# Altium PCB PSNEM-MCU-Subsystem.PcbDoc
Units mil, origin at the board's own origin, x right, y up, seen from the top; angles counter-clockwise.
Board outline 3000 x 2000 mil, 4 copper layers (Top Layer, GROUND, POWER, Bottom Layer), stack 23.756 mil thick; 36 components, 24 nets, 171 pads, 28 vias.
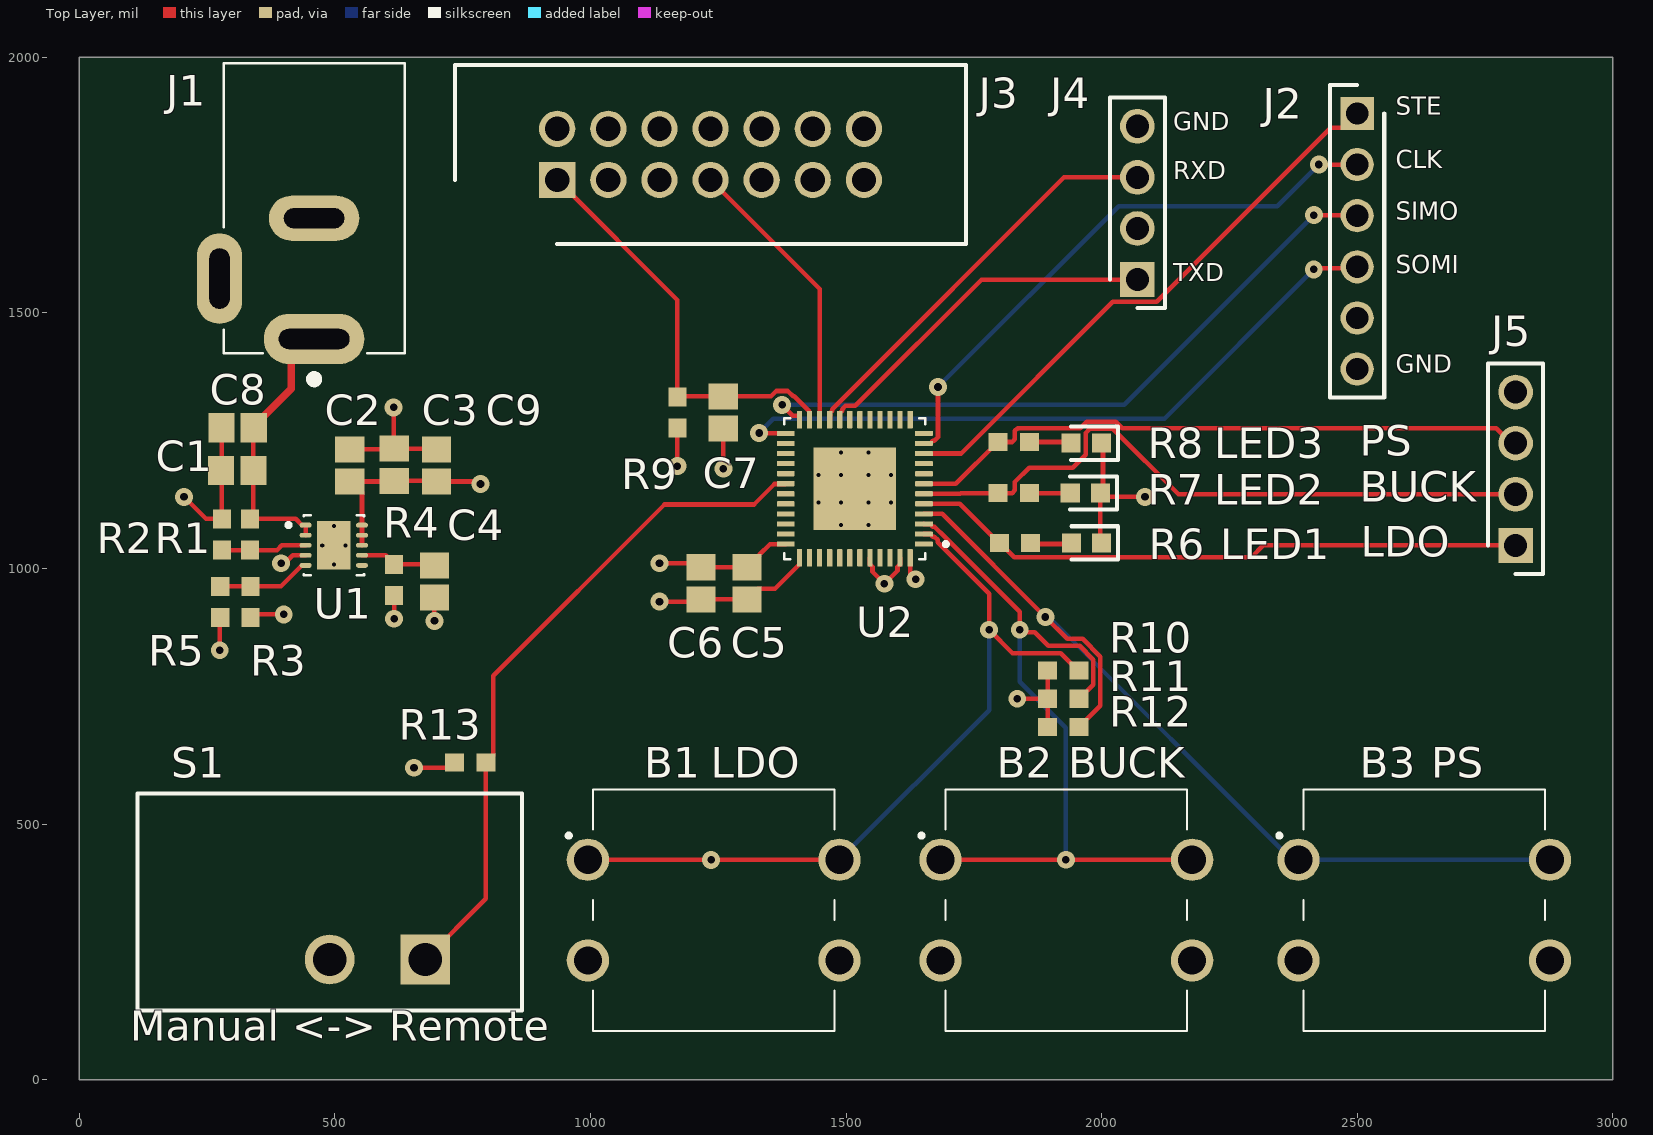
[diagram p0: Top Layer view]
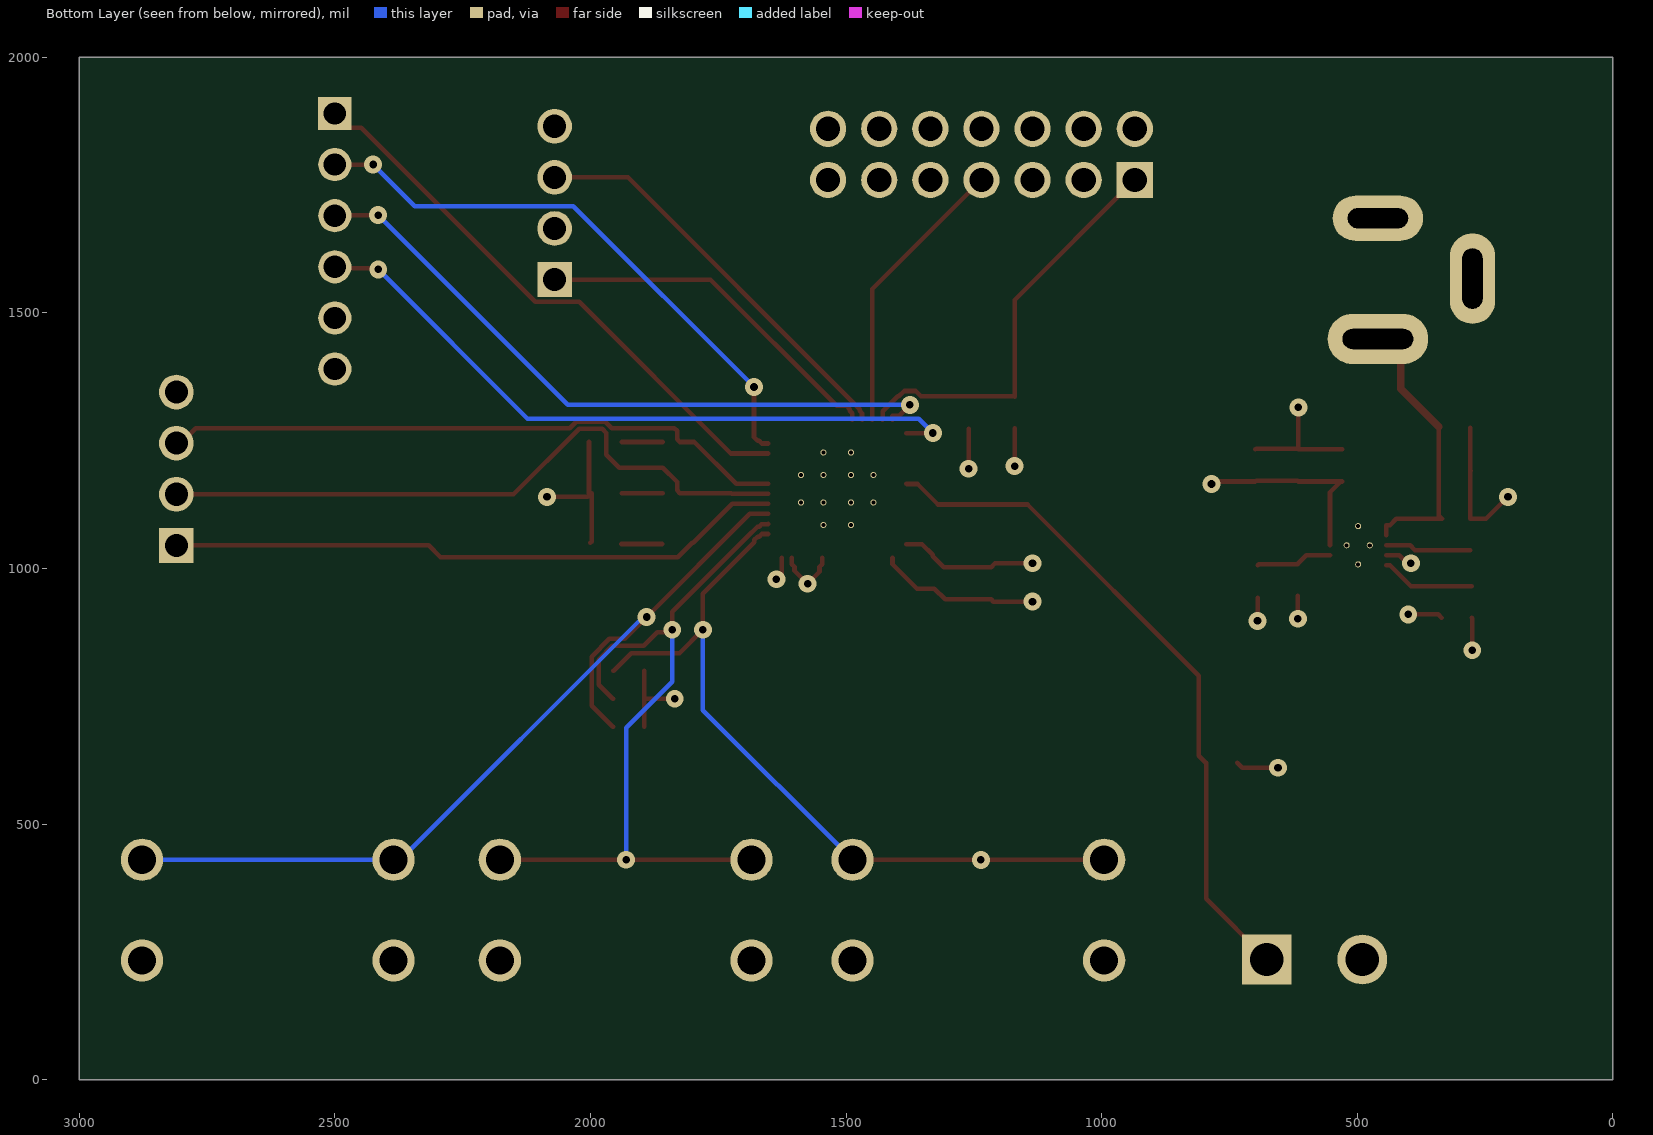
[diagram p1: Bottom Layer view, seen from below]
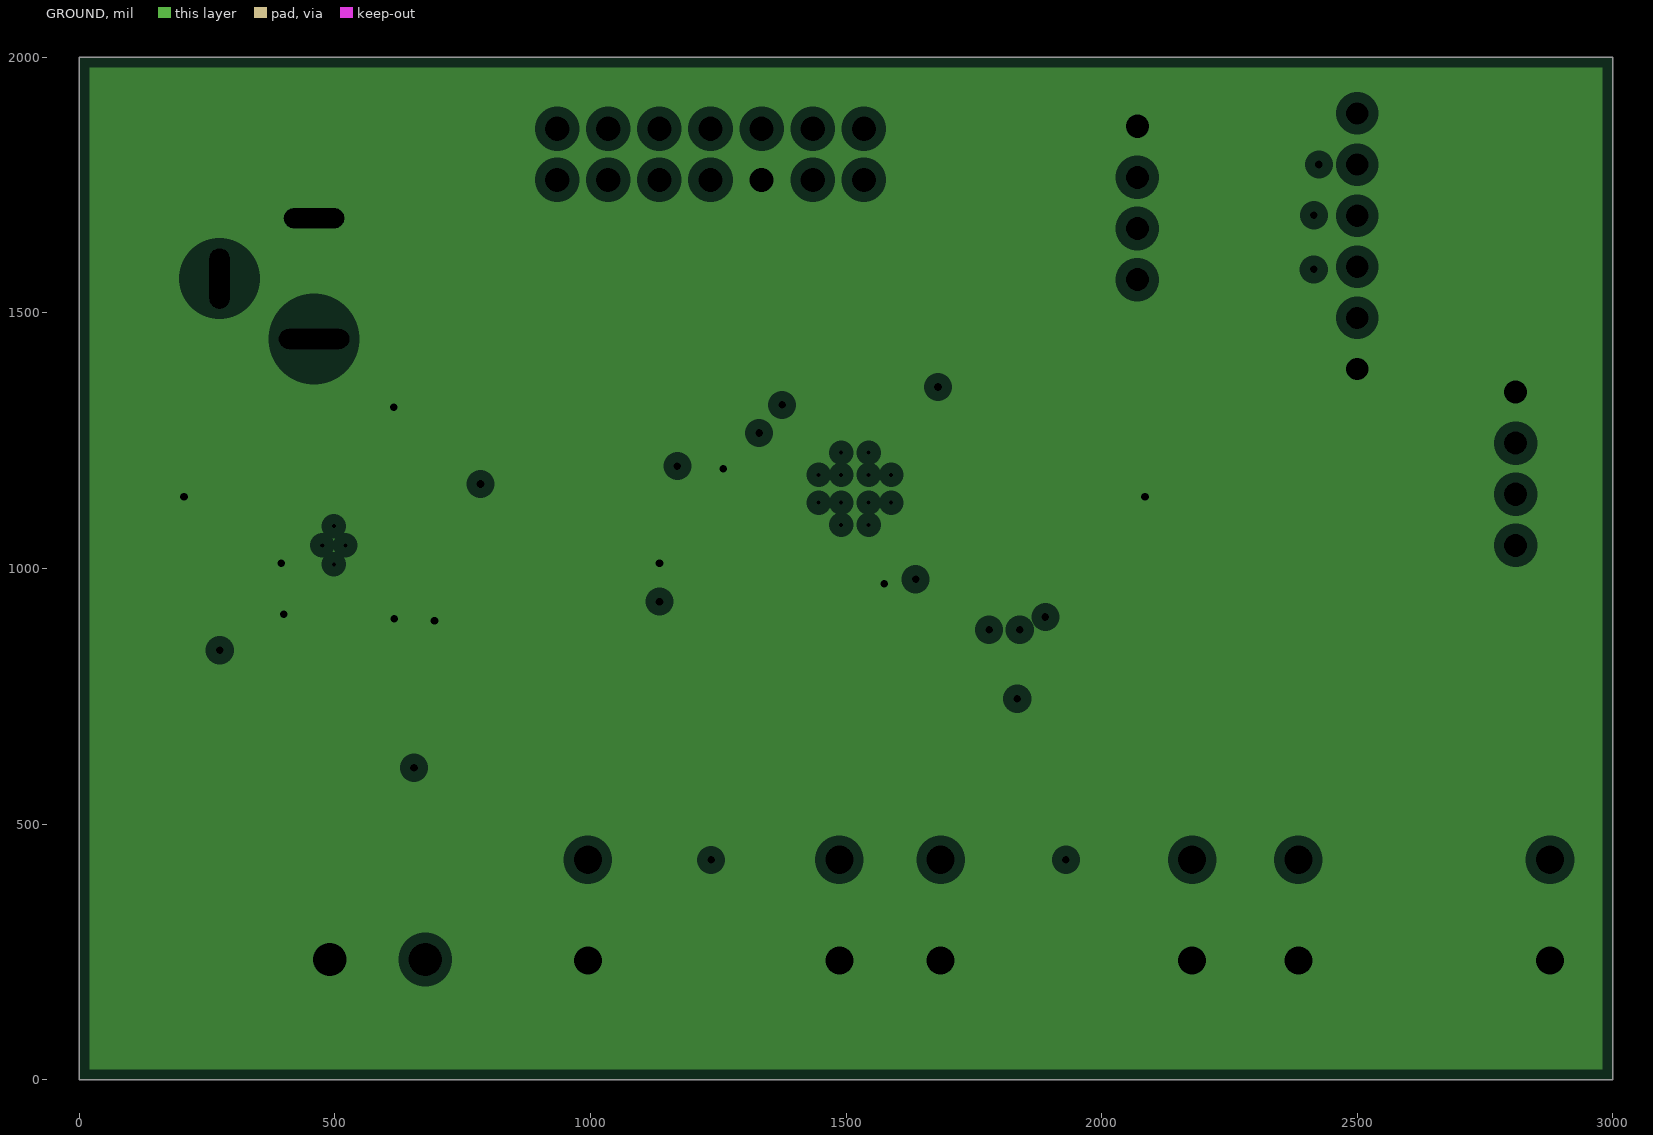
[diagram p2: GROUND, clearances drawn from the general rule]
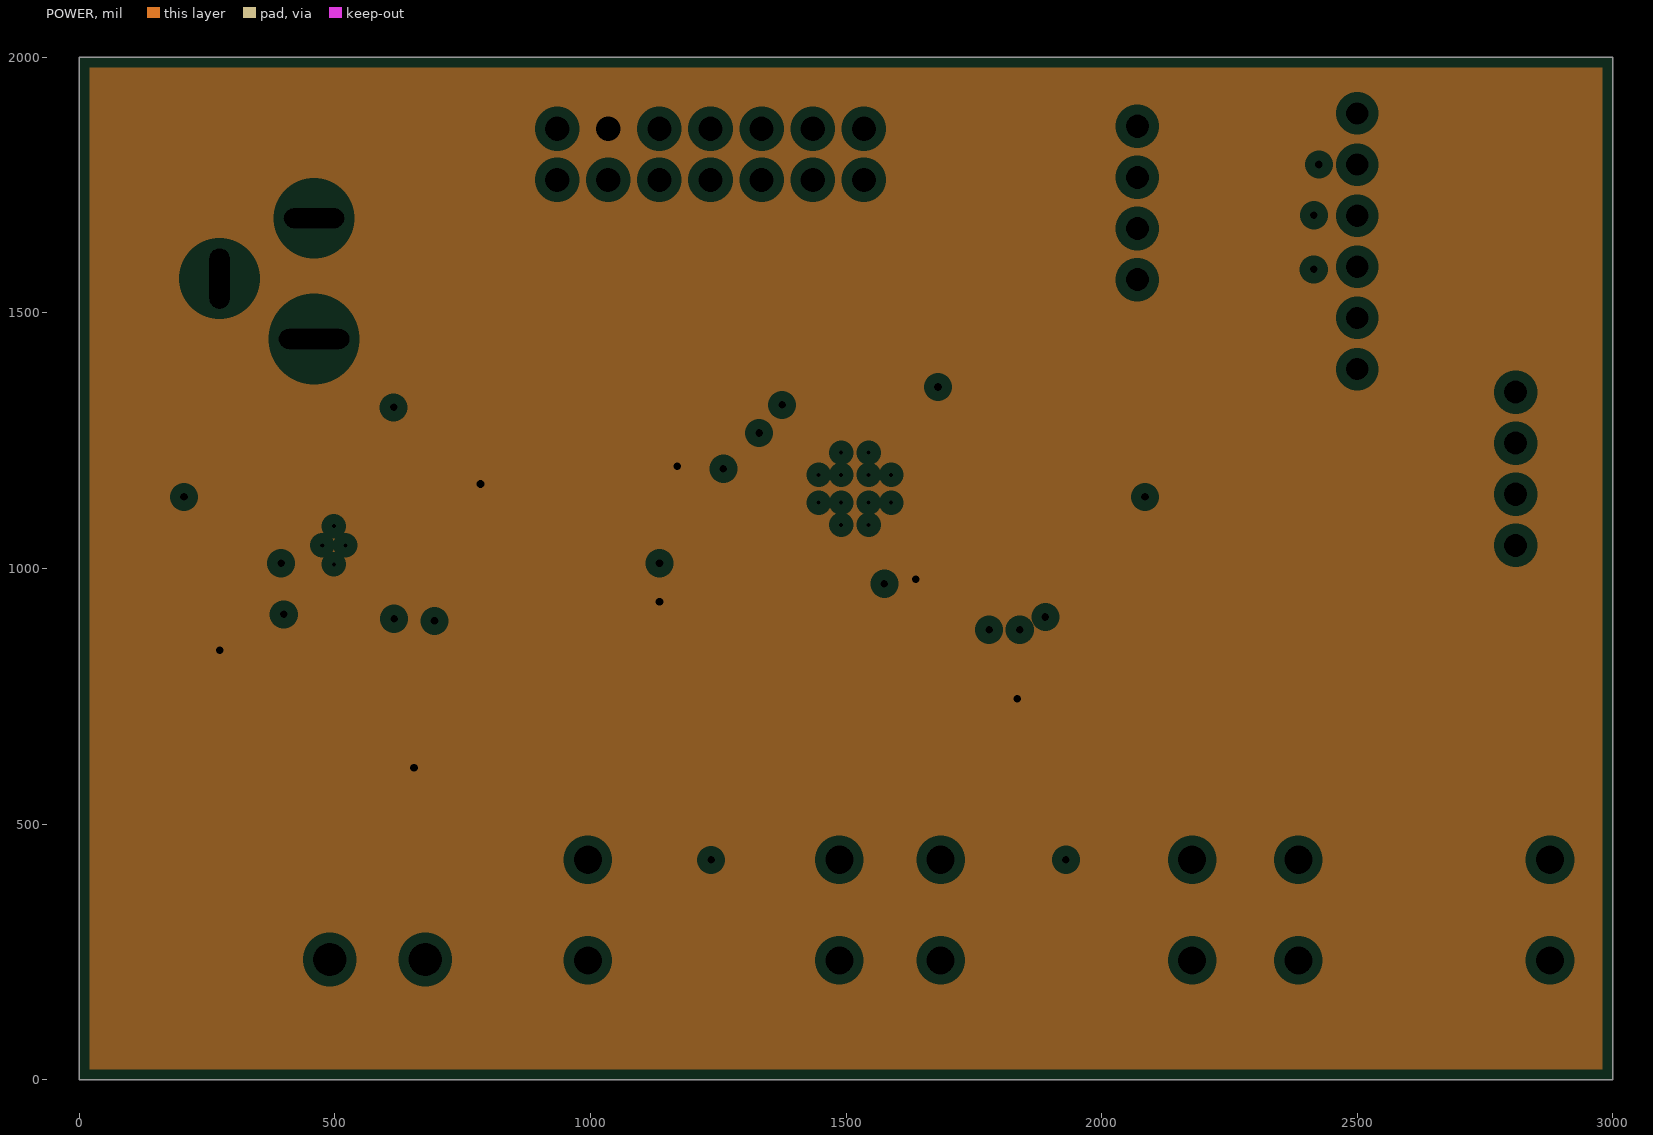
[diagram p3: POWER, clearances drawn from the general rule]

## Layer stack, top to bottom
Top Solder: solder mask 0.4, Solder Resist, Dk 3.5
Top Layer: signal copper 1.378
Dielectric 2: prepreg 2.8, PP-006, Dk 4.1
GROUND: plane copper 1.4, net GND
Dielectric 1: dielectric 12.6, FR-4, Dk 4.8
POWER: plane copper 1.4, net NetC2_1
Dielectric 3: prepreg 2.8, PP-006, Dk 4.1
Bottom Layer: signal copper 1.378
Bottom Solder: solder mask 0.4, Solder Resist, Dk 3.5

## Board outline
0,0 0,2000 3000,2000 3000,0

## Design rules (kind name [scope] priority, off if disabled: settings)
Clearance [All] p1: gap=5 ignorepadtopadclearanceinfootprint=TRUE
HoleSize [All] p1: absolutevalues=TRUE maxlimit=200 minlimit=7 maxpercent=80.000 minpercent=20.000
MinimumSolderMaskSliver [All] p1: minsoldermaskwidth=5
PlaneClearance [All] p1: clearance=20
PlaneConnect [All] p1: planeconnectstyle=Relief reliefexpansion=20 reliefentries=4 reliefconductorwidth=10 reliefairgap=10
PolygonConnect [All] p1: connectstyle=Relief reliefconductorwidth=10 reliefentries=4 polygonreliefangle="90 Angle" airgapwidth=10
RoutingVias [All] p1: holewidth=28 width=50 viastyle="Through Hole" minholewidth=15 minwidth=35 maxholewidth=15 maxwidth=35
SilkToSolderMaskClearance [IsPad] p1: minsilkscreentomaskgap=5 clearancetoexposedcopper=TRUE
SolderMaskExpansion [All] p1: expansion=4 istentingtop=FALSE
SupplyNets "Schematic Supply Nets_8" [InNet('+3.3V')] p1: voltage=0.000
SupplyNets "Schematic Supply Nets_7" [InNet('GND')] p2: voltage=0.000
SupplyNets "Schematic Supply Nets" [InNet('+5V')] p3: voltage=0.000
Width [All] p1: maxlimit=1000 minlimit=5 preferedwidth=9
25 further rules are at their usual default settings.

## Classes and differential pairs
component class U_Power: C1 C2 C3 C4 C8 C9 J1 R1 R2 R3 R4 R5 U1
component class U_MicroController: B1 B2 B3 C5 C6 J5 LED1 LED2 LED3 R6 R7 R8 R10 R11 R12 R13 S1 U2
component class U_Connectors: C7 J2 J3 J4 R9

## Components (designator, comment, footprint, x,y, rotation, side; value= is the part's Value field where it differs from the comment)
B1 "FSM101" FSM101 1245,320 r180 top
B2 "FSM101" FSM101 1935,320 r180 top
B3 "FSM101" FSM101 2635,320 r180 top
C1 "10u" "0805 Cap" 309.13,1191.42 r180 top
C2 "10u" "0805 Cap" 529.13,1201.42 r90 top
C3 "1u" "0805 Cap" 616.14,1202.76 r270 top
C4 "4.7u" "0805 Cap" 694.88,974.41 r90 top
C5 "1u" "0805 Cap" 1306.17,970.91 r270 top
C6 "0.1u" "0805 Cap" 1216.17,970.91 r270 top
C7 "2.2n" "0805 Cap" 1260,1305 r90 top
C8 "0.1u" "0805 Cap" 310,1275 r0 top
C9 "0.1u" "0805 Cap" 699.13,1201.42 r90 top
J1 "PJ-002B" PJ-002B 459.53,1685.04 r90 top
J2 "61300611121" 61300611121 2500,1890 r270 top
J3 "0702461402" 0702461402 1235,1810 r0 top
J4 "61300411121" 61300411121 2070,1715 r90 top
J5 "61300411121" 61300411121 2810,1195 r90 top
LED1 "150060VS75000" 150060VS75000 1970.51,1050 r180 top
LED2 "150060VS75000" 150060VS75000 1968.19,1147.34 r180 top
LED3 "150060VS75000" 150060VS75000 1970,1245 r180 top
R1 "226k" RESC1608X06N 334.13,1066.42 r90 top
R2 "100K" RESC1608X06N 279.13,1066.42 r270 top
R3 "100K" RESC1608X06N 335,934.21 r270 top
R4 "22.1K" RESC1608X06N 616.14,977.36 r90 top
R5 "1.5M" RESC1608X06N 275.94,934.21 r90 top
R6 "64.9" RESC1608X06N 1830.51,1050 r0 top
R7 "64.9" RESC1608X06N 1828.19,1147.34 r0 top
R8 "64.9" RESC1608X06N 1828.19,1247.34 r0 top
R9 "47K" RESC1608X06N 1170,1305 r270 top
R10 "10K" RESC1608X06N 1925,800 r180 top
R11 "10K" RESC1608X06N 1925,745 r180 top
R12 "10K" RESC1608X06N 1925,690 r180 top
R13 "10K" RESC1608X06N 765,620 r180 top
S1 "L101011MS02Q" L101011MS02Q 677.01,235 r90 top
U1 "TPS7A9401DSCR" TPS7A9401DSCR 498.03,1045.28 r0 top
U2 "MSP430FR5969IRGZR" MSP430FR5969IRGZR 1517.24,1155.83 r180 top

## Footprints (in the part's own frame and the unit in brackets; to place one, negate y for a bottom-side part, rotate by r counter-clockwise, add the part's x,y. Pads: shape width x height; smd on the part's side, far side on the other; paste and mask are expansions set on the pad)
"0805 Cap" [mm] "Chip Capacitor, 2-Leads, Body 2.00x1.25mm, IPC Medium Density"
  rect 1.3x1.45 smd: 1(-0.8,0) 2(0.8,0)
  body extent -1.1,-0.72 1.1,0.72, height 1.45
150060VS75000 [mm] "LED GREEN CLEAR 0603 SMD"
  rect 0.95x0.95 smd: 1(-0.75,0) 2(0.75,0)
  silkscreen extent -1.58,-0.82 0.75,0.82, body extent -0.8,-0.4 0.8,0.4, height 0.7
0702461402 [mm] "Connector Header Through Hole 14 position 0.100\" (2.54mm)"
  rect 1.8x1.8 / inner round 1.8 / far side rect 1.8x1.8 hole 1.2: 1(-7.62,-1.27)
  round 1.8 hole 1.2: 2(-7.62,1.27) 3(-5.08,-1.27) 4(-5.08,1.27) 5(-2.54,-1.27) 6(-2.54,1.27) 7(0,-1.27) 8(0,1.27) 9(2.54,-1.27) 10(2.54,1.27) 11(5.08,-1.27) 12(5.08,1.27) 13(7.62,-1.27) 14(7.62,1.27)
  silkscreen extent -12.7,-4.44 12.7,4.44, body extent -12.7,-4.44 12.7,4.44, height 9.3
61300411121 [mm] "Connector Header Through Hole 4 position 0.100\" (2.54mm)"
  rect 1.725x1.725 / inner round 1.725 / far side rect 1.725x1.725 hole 1.15: 1(-3.81,0)
  round 1.725 hole 1.15: 2(-1.27,0) 3(1.27,0) 4(3.81,0)
  silkscreen extent -5.23,-1.37 5.23,1.37, body extent -5.08,-1.27 5.08,1.27, height 7.27
61300611121 [mm] "Connector Header Through Hole 6 position 0.100\" (2.54mm)"
  rect 1.65x1.65 / inner round 1.65 / far side rect 1.65x1.65 hole 1.1: 1(0,0)
  round 1.65 hole 1.1: 2(2.54,0) 3(5.08,0) 4(7.62,0) 5(10.16,0) 6(12.7,0)
  silkscreen extent -1.42,-1.35 14.12,1.35, body extent -1.27,-1.27 13.97,1.27, height 8.69
FSM101 [mm] "Tactile Switch SPST-NO Top Actuated Through Hole"
  round 2.1 hole 1.4: 1(6.35,-2.794) 2(-6.15,-2.794) 3(6.35,2.206) 4(-6.15,2.206)
  silkscreen extent -5.9,-6.29 7.4,5.71, body extent -6.85,-6.29 6.85,5.72, height 7.6
L101011MS02Q [mm] "SWITCH SLIDE SPST 4A 125V"
  rect 2.475x2.475 hole 1.65: 1(0,0)
  round 2.475 hole 1.65: 2(0,4.75)
  silkscreen extent -2.55,-4.8 8.25,14.3, body extent -2.6,-4.85 8.19,14.25, height 14.1
MSP430FR5969IRGZR [mm] "MSP430 CPUXV2 MSP430™ FRAM Microcontroller IC 16-Bit 16MHz 64KB (64K x 8) FRAM 48-VQFN (7x7)"
  rrect25% 0.88x0.26 smd: 1(-3.435,2.75) 2(-3.435,2.25) 3(-3.435,1.75) 4(-3.435,1.25) 5(-3.435,0.75) 6(-3.435,0.25) 7(-3.435,-0.25) 8(-3.435,-0.75) 9(-3.435,-1.25) 10(-3.435,-1.75) 11(-3.435,-2.25) 12(-3.435,-2.75) 25(3.435,-2.75) 26(3.435,-2.25) 27(3.435,-1.75) 28(3.435,-1.25) 29(3.435,-0.75) 30(3.435,-0.25) 31(3.435,0.25) 32(3.435,0.75) 33(3.435,1.25) 34(3.435,1.75) 35(3.435,2.25) 36(3.435,2.75)
  rrect25% 0.26x0.88 smd: 13(-2.75,-3.435) 14(-2.25,-3.435) 15(-1.75,-3.435) 16(-1.25,-3.435) 17(-0.75,-3.435) 18(-0.25,-3.435) 19(0.25,-3.435) 20(0.75,-3.435) 21(1.25,-3.435) 22(1.75,-3.435) 23(2.25,-3.435) 24(2.75,-3.435) 37(2.75,3.435) 38(2.25,3.435) 39(1.75,3.435) 40(1.25,3.435) 41(0.75,3.435) 42(0.25,3.435) 43(-0.25,3.435) 44(-0.75,3.435) 45(-1.25,3.435) 46(-1.75,3.435) 47(-2.25,3.435) 48(-2.75,3.435)
  rect 4.1x4.1 smd paste-1.465: 49(0,0)
  round 0.3 hole 0.2: 50(-0.685,1.8) 51(0.685,1.8) 52(-1.8,0.685) 53(-0.685,0.685) 54(0.685,0.685) 55(1.8,0.685) 56(-1.8,-0.685) 57(-0.685,-0.685) 58(0.685,-0.685) 59(1.8,-0.685) 60(-0.685,-1.8) 61(0.685,-1.8)
  silkscreen extent -4.62,-3.5 3.5,3.5, body extent -3.5,-3.5 3.5,3.5, height 1
PJ-002B [mm] "Power Barrel Connector Jack 2.50mm ID (0.098\"), 5.50mm OD (0.217\") Through Hole, Right Angle"
  oval 2.5x5 hole 1 slot 3.5 at 90 deg: 1(-6,0)
  oval 2.25x4.5 hole 1 slot 3 at 90 deg: 2(0,0)
  oval 4.5x2.25 hole 1 slot 3 at 0 deg: 3(-3,4.7)
  silkscreen extent -8.2,-4.5 7.7,4.5, body extent -6.7,-4.5 7.7,4.9, height 11
RESC1608X06N [mm] "Chip Resistor, 2-Leads, Body 1.60x0.80mm, IPC Medium Density"
  rect 0.95x0.9 smd: 1(-0.775,0) 2(0.775,0)
  body extent -0.9,-0.45 0.9,0.45, height 0.55
TPS7A9401DSCR [mm] "Linear Voltage Regulator IC Positive Adjustable 1 Output 1A 10-WSON (3x3)"
  oval 0.6x0.24 smd paste-1 mask+0: 1(-1.4,1) 2(-1.4,0.5) 3(-1.4,0) 4(-1.4,-0.5) 5(-1.4,-1) 6(1.4,-1) 7(1.4,-0.5) 8(1.4,0) 9(1.4,0.5) 10(1.4,1)
  rect 1.65x2.4 smd paste-2 mask+0.07: 11(0,0)
  round 0.3 hole 0.2 mask+0: 12(0,0.95) 13(-0.575,0) 14(0.575,0) 15(0,-0.95)
  silkscreen extent -2.35,-1.5 1.5,1.5, body extent -1.5,-1.5 1.5,1.5, height 0.8

## Part data
B1 B2 B3: "Tactile Switch SPST-NO Top Actuated Through Hole"
C1 C2: library part CL21B106KPQNNNE, "10 µF ±10% 10V Ceramic Capacitor X7R 0805 (2012 Metric)"
C3 C5: library part CC0805KKX7R7BB105, "1 µF ±10% 16V Ceramic Capacitor X7R 0805 (2012 Metric)"
C4: library part CL21B475KOFNFNE, "4.7 µF ±10% 16V Ceramic Capacitor X7R 0805 (2012 Metric)"
C6 C8 C9: library part CC0805KRX7R9BB104, "0.1 µF ±10% 50V Ceramic Capacitor X7R 0805 (2012 Metric)"
C7: library part CC0805KRX7R9BB222, "2200 pF ±10% 50V Ceramic Capacitor X7R 0805 (2012 Metric)"
J1: "Power Barrel Connector Jack 2.50mm ID (0.098\"), 5.50mm OD (0.217\") Through Hole, Right Angle"
J2: "CONN HEADER VERT 6POS 2.54MM"
J3: "Connector Header Through Hole 14 position 0.100\" (2.54mm)"
J4 J5: "Connector Header Through Hole 4 position 0.100\" (2.54mm)"
LED1 LED2 LED3: "LED GREEN CLEAR 0603 SMD"
R1: library part RN73H1JTTD2263B25, "Thin Film Resistors - SMD 226kOhm,0603,0.1%,25"
R2 R3: library part ERA-3VRW1003V, "Thin Film Resistors - SMD 0603 0.05% 100Kohm 10ppm SMD"
R4: library part TNPW060322K1BEEA, "Thin Film Resistors - SMD 22.1Kohms .1% 25ppm"
R5: library part MCT0603MD1504BP500, "Thin Film Resistors - SMD .125W 1.5Mohms .1% 0603 25ppm"
R6 R7 R8: library part ERA-3AEB64R9V, "Thin Film Resistors - SMD 0603 64.9ohm 0.1% 25ppm"
R9: library part ERA-3VEB4702V, "Thin Film Resistors - SMD 0603 0.1% 47Kohm 25ppm SMD"
R10 R11 R12 R13: library part CRCW060310K0FKEAHP, "RES SMD 10K OHM 1% 1/3W 0603"
S1: "SWITCH SLIDE SPST 4A 125V"
U1: "Linear Voltage Regulator IC Positive Adjustable 1 Output 1A 10-WSON (3x3)", Manufacturer="Texas Instruments", Manufacturer PN=TPS7A9401DSCR
U2: "MSP430 CPUXV2 MSP430™ FRAM Microcontroller IC 16-Bit 16MHz 64KB (64K x 8) FRAM 48-VQFN (7x7)"

## Via types
v1: diameter 35, hole 15, Top Layer to Bottom Layer, 28 vias

## Nets (pads, with @x,y where several pads share a name; then routed paths per layer and width w, separated by ;. In a path a pad name is that pad's centre, name@x,y a point inside that pad or via, vN(x,y) a via of type N, cw(c..) or ccw(c..) an arc to the next point about the centre after c; other vN are vias at no path point)
+3.3V: C2.1 C3.2 C5.2 C6.2 C9.1 J3.4 R5.1 R9.2 R10.2 R11.2 R12.2 R13.2 U1.8 U1.9 U1.10 U2.37 U2.48 | length 1146.8
  Top Layer w9: v1(275,840) 275,902.76 R5.1 ; C2.1 C2.1@532.06,1169.92 ; U1.8 U1.9 U1.10 553.15,1148.83 C2.1@532.06,1169.92 ; v1(655,610) 724.49,610 R13.2 ; v1(785,1165) 780.08,1169.92 C9.1 697.8,1171.26 C3.2 614.8,1169.92 C2.1@532.06,1169.92 ; v1(1135,935) 1211.76,935 C6.2 C5.2 1327.26,960.5 1361.09,960.5 1408.98,1008.39 U2.37 ; v1(1170,1200) R9.2 ; U2.48 1625.51,989.52 v1(1636.18,978.85) ; v1(1835,745) R11.2 ; R12.2 R11.2 ; R10.2 R11.2
+5V: C1.1 C8.2 J1.1 R1.2 U1.1 U1.2 | length 539.4
  Top Layer w9: C8.2@340.63,1277.09 C1.1 340.63,1103.43 R1.2 423.42,1096.93 435.71,1084.65 U1.1 U1.2
  Top Layer w15: C8.2@340.63,1277.09 414.81,1351.27 414.81,1407.51 456.12,1448.82 J1.1
Buck_Button: B2.1 B2.2 R11.1 U2.3 | length 1529.9
  Top Layer w9: U2.3 1653.1,1086.31 1665.3,1086.31 1669.75,1081.86 1673.1,1081.86 1693.3,1061.66 1693.3,1061.55 1840,914.85 v1(1840,880) 1844.97,875.03 1869.32,875.03 1896.01,848.33 1957.03,848.33 1983.71,821.65 1983.71,772.22 1956.5,745 R11.1 ; B2.1 v1(1930,430) B2.2
  Bottom Layer w9: v1(1840,880) 1840,778.18 1930,688.18 v1(1930,430)
Buck_LED: J5.2 R7.1 U2.6 | length 1297.9
  Top Layer w9: U2.6 1723.68,1145.98 1725.03,1147.34 R7.1 1825.23,1147.34 1830.5,1152.61 1830.5,1168.99 1858.51,1197 1943.31,1197 1968.67,1222.36 1968.67,1264.98 1976.89,1273.2 2022.16,1273.2 2150.36,1145 J5.2
GND: B1.3 B1.4 B2.3 B2.4 B3.3 B3.4 C1.2 C2.2 C3.1 C4.1 C5.1 C6.1 C7.1 C8.1 C9.2 J1.2 J2.6 J3.9 J4.4 J5.4 LED1.1 LED2.1 LED3.1 R2.1 R3.2 R4.1 S1.2 U1.4 U2.36 U2.44 U2.47 | length 1508.5
  Top Layer w9: v1(205,1140) 248.07,1096.93 R2.1 279.13,1189.92 C1.2 278.5,1192.28 C8.1 ; R3.2 341.3,910 v1(400,910) ; v1(395,1010) 402.01,1010 417.6,1025.59 U1.4 ; C2.2 614.8,1232.91 C3.1 ; v1(615,1315) 615,1235.39 C3.1 ; v1(616.14,901.42) R4.1 ; v1(694.88,897.48) C4.1 ; C9.2 697.8,1234.25 C3.1 ; v1(1135,1010) 1208.57,1010 C6.1 C5.1 1309.12,1002.4 1330.21,1023.49 1330.21,1026.44 1351.33,1047.56 U2.36 ; v1(1260,1195) C7.1 ; B1.4 B1.4@1488.7,231.57 ; U2.44 1546.77,1008.39 1551.84,1003.32 1551.84,993.16 v1(1575,970) 1600.76,995.76 1600.76,1003.32 1605.83,1008.39 U2.47 ; B2.3@1683.43,231.57 B2.3 ; LED1.1 1997.72,1052.32 LED2.1 2005.05,1140 v1(2085,1140) ; LED2.1@2002.72,1147.34 LED3.1@2002.72,1247.34 ; B2.4 B2.4@2178.7,231.57 ; B3.3@2383.43,231.57 B3.3
LDO_Button: B1.1 B1.2 R10.1 U2.2 | length 1521.4
  Top Layer w9: B1.1 995.12,429.88 1236.14,429.88 v1(1236.25,429.76) 1236.37,429.88 1487.01,429.88 B1.2 ; U2.2 1664.69,1067.24 1669.75,1062.18 1672.99,1062.18 1679.3,1055.86 1679.3,1051.4 1780,950.7 v1(1780,880) 1825.67,834.33 1920.19,834.33 1954.53,800 R10.1
  Bottom Layer w9: B1.2 1780,722.87 v1(1780,880)
LDO_LED: J5.1 R6.1 U2.5 | length 1210.4
  Top Layer w9: U2.5 1722.72,1126.3 1799.02,1050 R6.1 1800.98,1050 1829.18,1021.8 2293.26,1021.8 2316.46,1045 J5.1
Mode_Switch: R13.1 S1.1 U2.30 | length 1338.3
  Top Layer w9: S1.1 795.51,353.5 R13.1 796.5,620 809.71,633.22 809.71,789.71 1145,1125 1320,1125 1360.05,1165.05 1381.39,1165.05 U2.30
NetC4_2: C4.2 R4.2 U1.7 | length 150.5
  Top Layer w9: U1.7 599.41,1025.59 616.14,1008.86 R4.2 692.91,1007.87 C4.2
NetC7_2: C7.2 J3.1 R9.1 U2.23 | length 817.5
  Top Layer w9: J3.1 1170,1525 R9.1 1170.98,1336.5 C7.2 1353.31,1336.5 1363.82,1347 1386.18,1347 1396.69,1336.5 1398.67,1336.5 1428.04,1307.12 1428.04,1291.68 U2.23
NetJ2_1: J2.1 U2.10 | length 1123.1
  Top Layer w9: U2.10 1725.21,1224.72 2022.03,1521.54 2107.89,1521.54 2448.37,1862.02 2472.02,1862.02 J2.1
NetJ2_2: J2.2 U2.11 | length 1131.2
  Top Layer w9: U2.11 1664.69,1244.41 1669.75,1249.48 1672.99,1249.48 1680,1256.49 v1(1680,1355) ; v1(2425,1790) J2.2
  Bottom Layer w9: v1(1680,1355) 2033.46,1708.46 2343.46,1708.46 v1(2425,1790)
NetJ2_3: J2.3 U2.24 | length 1329.3
  Top Layer w9: v1(1375,1320) 1396.01,1298.99 1408.36,1298.99 1408.98,1298.37 U2.24 ; v1(2415.25,1690.98) 2415.74,1690.49 2499.51,1690.49 J2.3
  Bottom Layer w9: v1(1375,1320) 2044.27,1320 v1(2415.25,1690.98)
NetJ2_4: J2.4 U2.25 | length 1357
  Top Layer w9: v1(1330,1265) 1330.45,1264.55 1381.56,1264.55 U2.25 ; v1(2415,1585) 2417.5,1587.5 2497.5,1587.5 J2.4
  Bottom Layer w9: v1(1330,1265) 1358,1293 2123,1293 v1(2415,1585)
NetJ3_7: J3.7 U2.22 | length 557.3
  Top Layer w9: J3.7 1448.35,1546.65 U2.22
NetJ4_1: J4.1 U2.20 | length 704.8
  Top Layer w9: U2.20 1487.72,1303.27 1492.78,1308.33 1492.78,1311.57 1499.1,1317.89 1517.89,1317.89 1765,1565 J4.1
NetJ4_3: J4.3 U2.21 | length 807.4
  Top Layer w9: U2.21 1468.65,1291.68 1468.65,1303.89 1473.1,1308.33 1473.1,1311.69 1493.3,1331.89 1493.41,1331.89 1926.53,1765 J4.3
NetLED1_2: LED1.2 R6.2 | length 80
  Top Layer w9: R6.2@1860,1047.72 LED1.2@1939.96,1047.72
NetLED2_2: LED2.2 R7.2 | length 80
  Top Layer w9: R7.2 LED2.2
NetLED3_2: LED3.2 R8.2 | length 80
  Top Layer w9: R8.2 LED3.2@1938.66,1247.34
NetR1_1: R1.1 R2.2 U1.3 | length 167.7
  Top Layer w9: R2.2 R1.1 386.84,1035.91 396.21,1045.28 U1.3
NetR3_1: R3.1 R5.2 U1.5 | length 184
  Top Layer w9: R5.2 R3.1 394.65,964.72 435.83,1005.91 U1.5
PS_Button: B3.1 B3.2 R12.1 U2.4 | length 1800.3
  Top Layer w9: U2.4 1688.39,1106.61 v1(1890,905) 1932.67,862.33 1962.83,862.33 1997.71,827.45 1997.71,731.22 1956.5,690 R12.1
  Bottom Layer w9: v1(1890,905) 1897.04,905 2372.04,430 B3.1 B3.2
PS_LED: J5.3 R8.1 U2.7 | length 1234.9
  Top Layer w9: U2.7 1715.02,1165.67 1796.69,1247.34 R8.1 1825.23,1247.34 1830.5,1252.61 1830.5,1268.99 1836.07,1274.55 1958.45,1274.55 1971.09,1287.2 2027.96,1287.2 2040.61,1274.55 2772.44,1274.55 2802,1245 J5.3
pads on no net: J1.3 J2.5 J3.2 J3.3 J3.5 J3.6 J3.8 J3.10 J3.11 J3.12 J3.13 J3.14 J4.2 U1.6 U1.11 U1.12 U1.13 U1.14 U1.15 U2.1 U2.8 U2.9 U2.12 U2.13 U2.14 U2.15 U2.16 U2.17 U2.18 U2.19 U2.26 U2.27 U2.28 U2.29 U2.31 U2.32 U2.33 U2.34 U2.35 U2.38 U2.39 U2.40 U2.41 U2.42 U2.43 U2.45 U2.46 U2.49 U2.50 U2.51 U2.52 U2.53 U2.54 U2.55 U2.56 U2.57 U2.58 U2.59 U2.60 U2.61

## Polygon pours and split planes (outlines as drawn)
GND on GROUND (split plane): 2979.9,20.1 20.1,20.1 20.1,1979.9 2979.9,1979.9
+3.3V on POWER (split plane): 2979.9,20.1 20.1,20.1 20.1,1979.9 2979.9,1979.9

## Other copper
POWER (plane layer: these items are gaps in the copper):
  lines w10: 2625,0 2670,0

## Silkscreen, mask and mechanical layers (free items; w line width, h text height)
Top Overlay:
  text "STE" at 2575,1875.67 h60
  text "GND" at 2140,1845.67 h60
  text "CLK" at 2575,1770.67 h60
  text "RXD" at 2140,1750 h60
  text "SIMO" at 2575,1670.67 h60
  text "SOMI" at 2575,1565.67 h60
  text "TXD" at 2140,1550 h60
  text "GND" at 2575,1370.67 h60
  text "PS" at 2505,1220 h60
  text "BUCK" at 2505,1130 h60
  text "LDO" at 2507.32,1022.66 h60
  text "LDO" at 1235,590 h60
  text "BUCK" at 1935,590 h60
  text "PS" at 2645,590 h60
  text "Manual <-> Remote" at 100,56.02 h100
Mechanical 1:
  the board outline again, w10